# Altium PCB PCB2.PcbDoc
Units mil, origin at the board's own origin, x right, y up, seen from the top; angles counter-clockwise.
Board outline 6000 x 4000 mil, 2 copper layers (Top Layer, Bottom Layer); 26 components, 32 nets, 157 pads, 0 vias.
Unrouted connection lines stored in the file: 63.
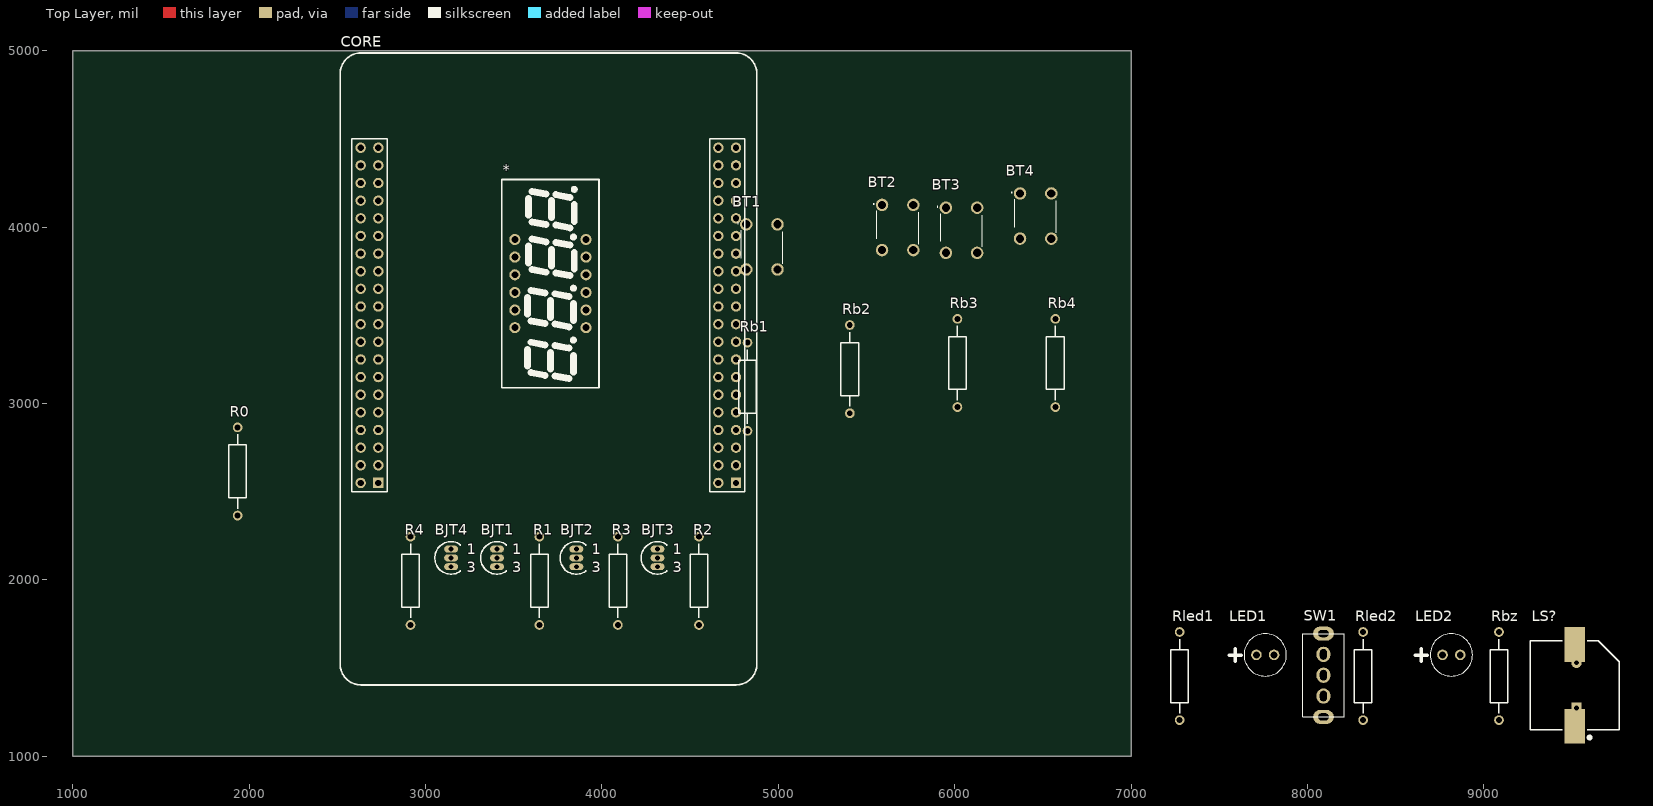
[diagram p0: Top Layer view]
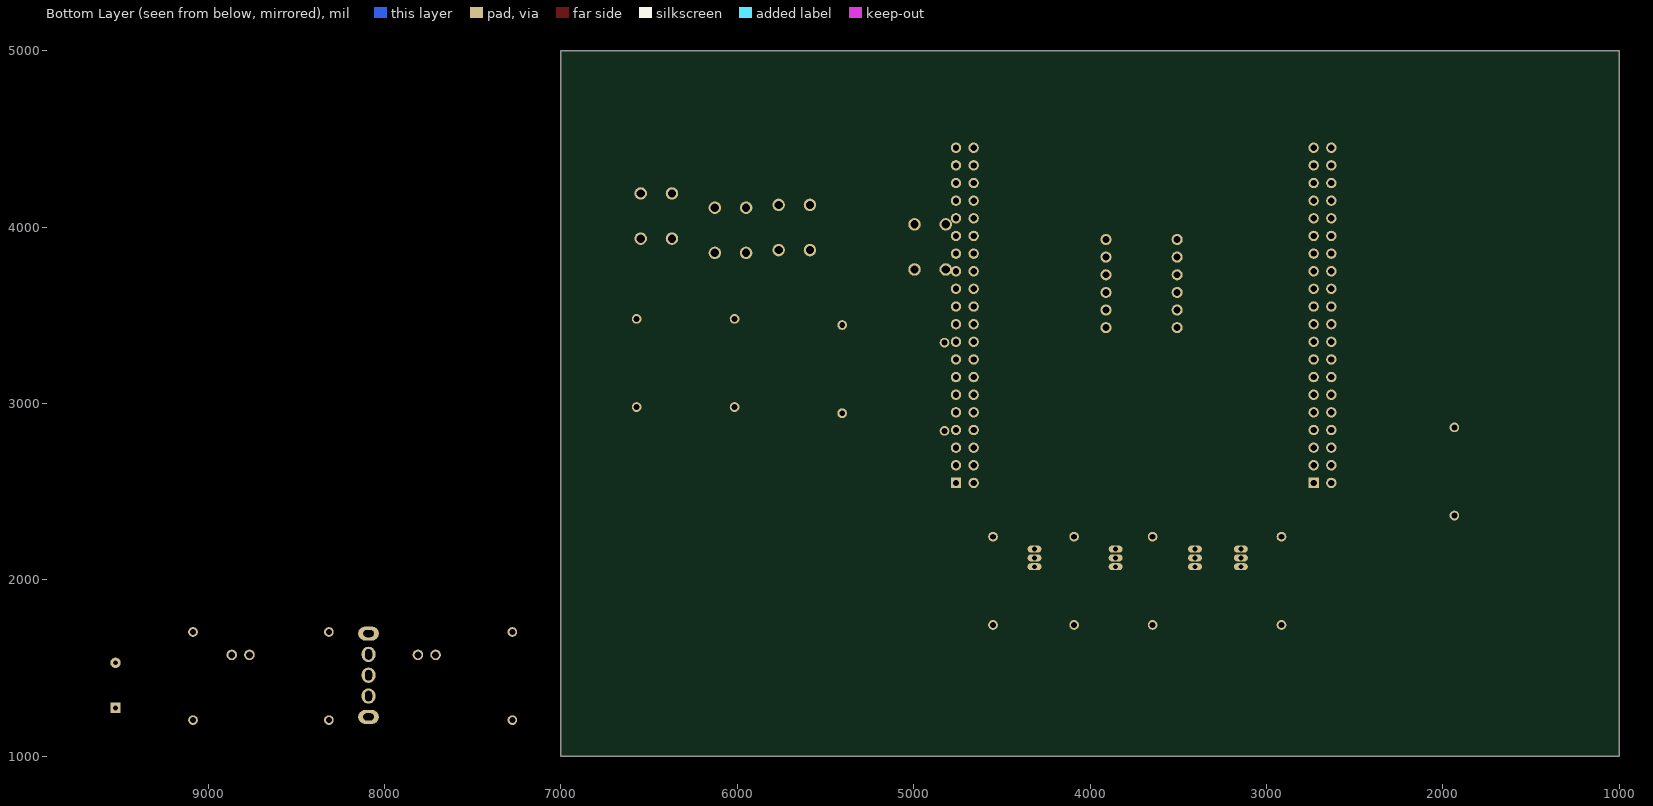
[diagram p1: Bottom Layer view, seen from below]

## Layer stack, top to bottom
Top Solder: solder mask 0.4, Solder Resist, Dk 3.5
Top Layer: signal copper 1.4
Dielectric 1: dielectric 12.6, FR-4, Dk 4.8
Bottom Layer: signal copper 1.4
Bottom Solder: solder mask 0.4, Solder Resist, Dk 3.5

## Board outline
1000,1000 7000,1000 7000,5000 1000,5000

## Design rules (kind name [scope] priority, off if disabled: settings)
Clearance [All] p1: gap=10 ignorepadtopadclearanceinfootprint=FALSE except(0: Arc-Hole Track-Hole SMDPad-Hole THPad-Hole Via-Hole Fill-Hole Poly-Hole Region-Hole Text-Hole)
PolygonConnect [All] p1: connectstyle=Relief reliefconductorwidth=10 reliefentries=4 polygonreliefangle="90 Angle" airgapwidth=10
RoomDefinition Sheet2 [InComponentClass('Sheet2')] p1: confinementstyle=ConfineIn formatcopy=TRUE lockcomponents=FALSE outline 2865,1755 4840,1755 4840,2335 2865,2335
RoutingVias [All] p1: holewidth=28 width=50 viastyle="Through Hole" minholewidth=28 minwidth=50 maxholewidth=28 maxwidth=50
SolderMaskExpansion [All] p1: expansion=4
Width [All] p1: maxlimit=10 minlimit=10 preferedwidth=10
30 further rules are at their usual default settings.

## Components (designator, comment, footprint, x,y, rotation, side; value= is the part's Value field where it differs from the comment)
* "DIG-4" DIG-4 3743.03,3700 r90 top
BJT1 "S8550" TO-92 3405,2125 r0 top
BJT2 "S8550" TO-92 3855,2125 r0 top
BJT3 "S8550" TO-92 4315,2125 r0 top
BJT4 "S8550" TO-92 3145,2125 r0 top
BT1 "Component_1" TS665CJ 4817.83,4015.91 r0 top
BT2 "Component_1" TS665CJ 5587.83,4125.91 r0 top
BT3 "Component_1" TS665CJ 5950,4110 r0 top
BT4 "Component_1" TS665CJ 6370,4190.91 r0 top
CORE "COREBOARD_CONNECTOR" coreboard_connector 4760,2550 r90 top
LED1 "LED" LED_TH_HLMP4700 7710,1575 r0 top
LED2 "LED" LED_TH_HLMP4700 8765,1575 r0 top
LS? "Buzzer" ABSM-1574 9515,1170 r90 top
R0 "10K" AXIAL-0.5 1935,2615 r90 top
R1 "470R" AXIAL-0.5 3645,1995 r90 top
R2 "470R" AXIAL-0.5 4550,1995 r90 top
R3 "470R" AXIAL-0.5 4090,1995 r90 top
R4 "470R" AXIAL-0.5 2915,1995 r90 top
Rb1 "10K" AXIAL-0.5 4825,3095 r90 top
Rb2 "10K" AXIAL-0.5 5405,3195 r90 top
Rb3 "10K" AXIAL-0.5 6015,3230 r90 top
Rb4 "10K" AXIAL-0.5 6570,3230 r90 top
Rbz "10K" AXIAL-0.5 9085,1455 r90 top
Rled1 "10K" AXIAL-0.5 7275,1455 r90 top
Rled2 "10K" AXIAL-0.5 8315,1455 r90 top
SW1 "SW-DP" SW-DP_5P_W 8090,1460 r90 top

## Footprints (in the part's own frame and the unit in brackets; to place one, negate y for a bottom-side part, rotate by r counter-clockwise, add the part's x,y. Pads: shape width x height; smd on the part's side, far side on the other; paste and mask are expansions set on the pad)
ABSM-1574 [mm] "Magnetic Transducer Buzzer"
  rect 5x3 smd: 1(0,0) 2(11.8,0)
  rect 1.5x1.5 hole 0.7: 1A(2.65,-0.24)
  round 1.5 hole 0.7: 2A(9.15,-0.24)
  silkscreen extent -1.83,-6.4 12.3,6.4
AXIAL-0.5 [mm] "Axial Device, Thru-Hole; 2 Leads; 0.5 in Pin Spacing"
  round 1.4 hole 0.85: 1(-6.35,0) 2(6.35,0)
  silkscreen extent -5.33,-1.27 5.33,1.27
coreboard_connector [mm] "Connector; Header40; 20x2 Position"
  rect 1.5x1.5 hole 0.9: 1(0,0) 41(0,51.5)
  round 1.5 hole 0.9: 2(0,2.54) 3(2.54,0) 4(2.54,2.54) 5(5.08,0) 6(5.08,2.54) 7(7.62,0) 8(7.62,2.54) 9(10.16,0) 10(10.16,2.54) 11(12.7,0) 12(12.7,2.54) 13(15.24,0) 14(15.24,2.54) 15(17.78,0) 16(17.78,2.54) 17(20.32,0) 18(20.32,2.54) 19(22.86,0) 20(22.86,2.54) 21(25.4,0) 22(25.4,2.54) 23(27.94,0) 24(27.94,2.54) 25(30.48,0) 26(30.48,2.54) 27(33.02,0) 28(33.02,2.54) 29(35.56,0) 30(35.56,2.54) 31(38.1,0) 32(38.1,2.54) 33(40.64,0) 34(40.64,2.54) 35(43.18,0) 36(43.18,2.54) 37(45.72,0) 38(45.72,2.54) 39(48.26,0) 40(48.26,2.54) 42(0,54.04) 43(2.54,51.5) 44(2.54,54.04) 45(5.08,51.5) 46(5.08,54.04) 47(7.62,51.5) 48(7.62,54.04) 49(10.16,51.5) 50(10.16,54.04) 51(12.7,51.5) 52(12.7,54.04) 53(15.24,51.5) 54(15.24,54.04) 55(17.78,51.5) 56(17.78,54.04) 57(20.32,51.5) 58(20.32,54.04) 59(22.86,51.5) 60(22.86,54.04) 61(25.4,51.5) 62(25.4,54.04) 63(27.94,51.5) 64(27.94,54.04) 65(30.48,51.5) 66(30.48,54.04) 67(33.02,51.5) 68(33.02,54.04) 69(35.56,51.5) 70(35.56,54.04) 71(38.1,51.5) 72(38.1,54.04) 73(40.64,51.5) 74(40.64,54.04) 75(43.18,51.5) 76(43.18,54.04) 77(45.72,51.5) 78(45.72,54.04) 79(48.26,51.5) 80(48.26,54.04)
  silkscreen extent -29.09,-3 61.91,57, body extent -1.27,-1.27 49.53,55.31, height 7.58
DIG-4 [mm]
  round 1.6 hole 1 mask+0.051: 1(-6.858,-4.241) 2(-4.318,-4.241) 3(-1.778,-4.241) 4(0.762,-4.241) 5(3.302,-4.241) 6(5.842,-4.241) 7(5.842,6.019) 8(3.302,6.019) 9(0.762,6.019) 10(-1.778,6.019) 11(-4.318,6.019) 12(-6.858,6.019)
  silkscreen extent -15.51,-6.11 14.49,7.89
LED_TH_HLMP4700 [mil]
  round 59.88 hole 38.5: 1(0,0) 2(100,0)
  silkscreen extent -155,-120 170,120, body extent -65,-114 163,114, height 378
SW-DP_5P_W [mm]
  oval 2x3 hole 1 slot 1.5 at 90 deg: 0(-6,0) 0(6,0)
  oval 2.2x2 hole 1 slot 1.5 at 0 deg: 1(0,0) 2(-3,0) 3(3,0)
  silkscreen extent -6,-3 6,3
TO-92 [mm] "TO, Flat Index; 3 In-Line, Axial Leads; Body Dia. 4.6mm; Leads 0.41 x 0.39 mm (max)"
  oval 2x1 hole 0.7: 1(0,1.27) 2(0,0) 3(0,-1.27)
  silkscreen extent -2.34,-2.34 1.35,2.34
TS665CJ [mm]
  round 1.8 hole 1.2: A1(0,0) B1(4.5,0) C1(0,-6.5) D1(4.5,-6.5)
  silkscreen extent -1.25,-5.65 5.25,0.2, body extent -0.75,-6.9 5.25,0.4, height 5.25

## Part data
LS?: "Magnetic Transducer Buzzer", ComponentLink1Description="Manufacturer Link", ComponentLink1URL=http://www.megastar.com/linecard/buzzmode/index.php, DatasheetVersion=17-Dec-2003, LatestRevisionDate=17-Dec-2003, LatestRevisionNote="Schematic revised, PCB Footprint replaced.", PackageDescription="Magnetic Transducer Buzzer", PackageReference=ABSM-1574, Published=24-Mar-1999, Publisher="Altium Limited"
R0 R1 R2 R3 R4 Rb1 Rb2 Rb3 Rb4 Rbz Rled1 Rled2: library part AXIAL

## Nets (pads, with @x,y where several pads share a name; then routed paths per layer and width w, separated by ;. In a path a pad name is that pad's centre, name@x,y a point inside that pad or via, vN(x,y) a via of type N, cw(c..) or ccw(c..) an arc to the next point about the centre after c; other vN are vias at no path point)
A: *.11 CORE.5
B: *.7 CORE.7
C: *.4 CORE.9
D: *.2 CORE.11
DIG1: CORE.23 R1.1
DIG2: CORE.25 R2.1
DIG3: CORE.27 R3.1
DIG4: CORE.29 R4.2
DP: *.3 CORE.19
E: *.1 CORE.13
F: *.10 CORE.15
G: *.5 CORE.17
GND: BT1.B1 BT2.B1 BT3.B1 BT4.B1 CORE.6 CORE.36 CORE.37 CORE.38 CORE.39 CORE.40 CORE.77 CORE.78 CORE.79 CORE.80 SW1.1
Net*_6: *.6 BJT4.3
Net*_8: *.8 BJT3.3
Net*_9: *.9 BJT2.3
Net*_12: *.12 BJT1.3
NetBJT1_2: BJT1.2 R1.2
NetBJT2_2: BJT2.2 R2.2
NetBJT3_2: BJT3.2 R3.2
NetBJT4_2: BJT4.2 R4.1
NetBT1_A1: BT1.A1 CORE.24 Rb1.2
NetBT2_A1: BT2.A1 CORE.26 Rb2.2
NetBT3_A1: BT3.A1 CORE.28 Rb3.2
NetBT4_A1: BT4.A1 CORE.30 Rb4.2
NetCORE_46: CORE.46 LS?.1 LS?.1A
NetCORE_70: CORE.70 Rled2.1
NetCORE_76: CORE.76 R0.1 Rled1.1 SW1.2
NetLED1_1: LED1.1 Rled1.2
NetLED2_1: LED2.1 Rled2.2
NetLS?_2: LS?.2 LS?.2A Rbz.1
VCC: BJT1.1 BJT2.1 BJT3.1 BJT4.1 CORE.1 CORE.2 LED1.2 LED2.2 R0.2 Rb1.1 Rb2.1 Rb3.1 Rb4.1 Rbz.2
pads on no net: BT1.C1 BT1.D1 BT2.C1 BT2.D1 BT3.C1 BT3.D1 BT4.C1 BT4.D1 CORE.3 CORE.4 CORE.8 CORE.10 CORE.12 CORE.14 CORE.16 CORE.18 CORE.20 CORE.21 CORE.22 CORE.31 CORE.32 CORE.33 CORE.34 CORE.35 CORE.41 CORE.42 CORE.43 CORE.44 CORE.45 CORE.47 CORE.48 CORE.49 CORE.50 CORE.51 CORE.52 CORE.53 CORE.54 CORE.55 CORE.56 CORE.57 CORE.58 CORE.59 CORE.60 CORE.61 CORE.62 CORE.63 CORE.64 CORE.65 CORE.66 CORE.67 CORE.68 CORE.69 CORE.71 CORE.72 CORE.73 CORE.74 CORE.75 SW1.0 SW1.3

## Text inside footprints (layer, text, board x,y; h text height)
BJT1: Top Overlay "3" at 3492.56,2044.88 h59.05; Top Overlay "1" at 3492.56,2147.05 h59.05
BJT2: Top Overlay "3" at 3942.56,2044.88 h59.05; Top Overlay "1" at 3942.56,2147.05 h59.05
BJT3: Top Overlay "3" at 4402.56,2044.88 h59.05; Top Overlay "1" at 4402.56,2147.05 h59.05
BJT4: Top Overlay "3" at 3232.56,2044.88 h59.05; Top Overlay "1" at 3232.56,2147.05 h59.05